# Altium PCB DriverV1.0.PcbDoc
Units mil, origin at the board's own origin, x right, y up, seen from the top; angles counter-clockwise.
Board outline 2047.24 x 1968.5 mil, 4 copper layers (Top, Gnd, Signal, Bottom), stack 58.4 mil thick; 73 components, 33 nets, 271 pads, 192 vias.
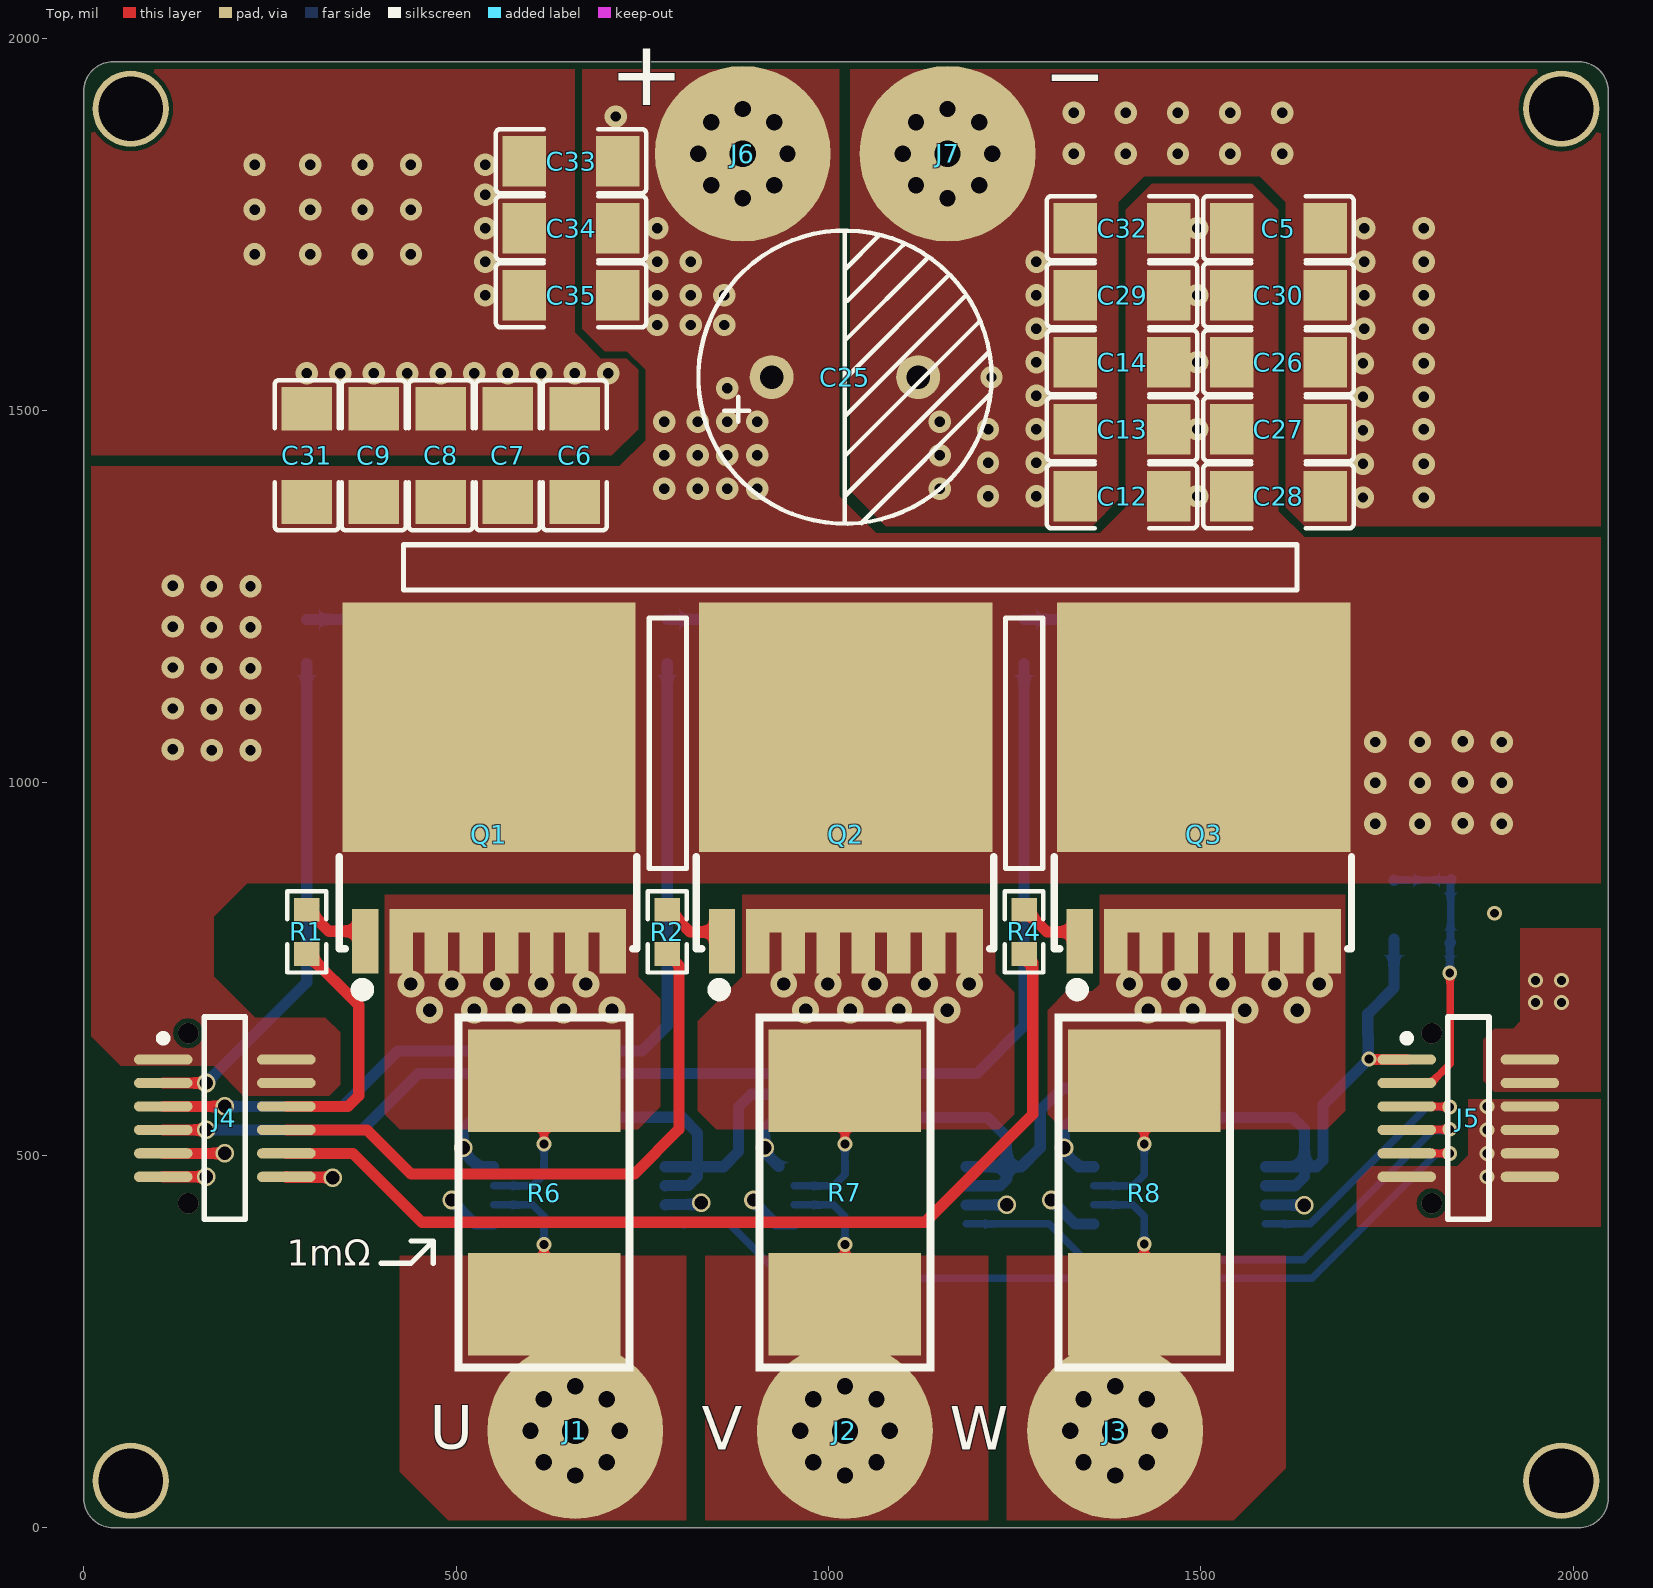
[diagram p0: Top view]
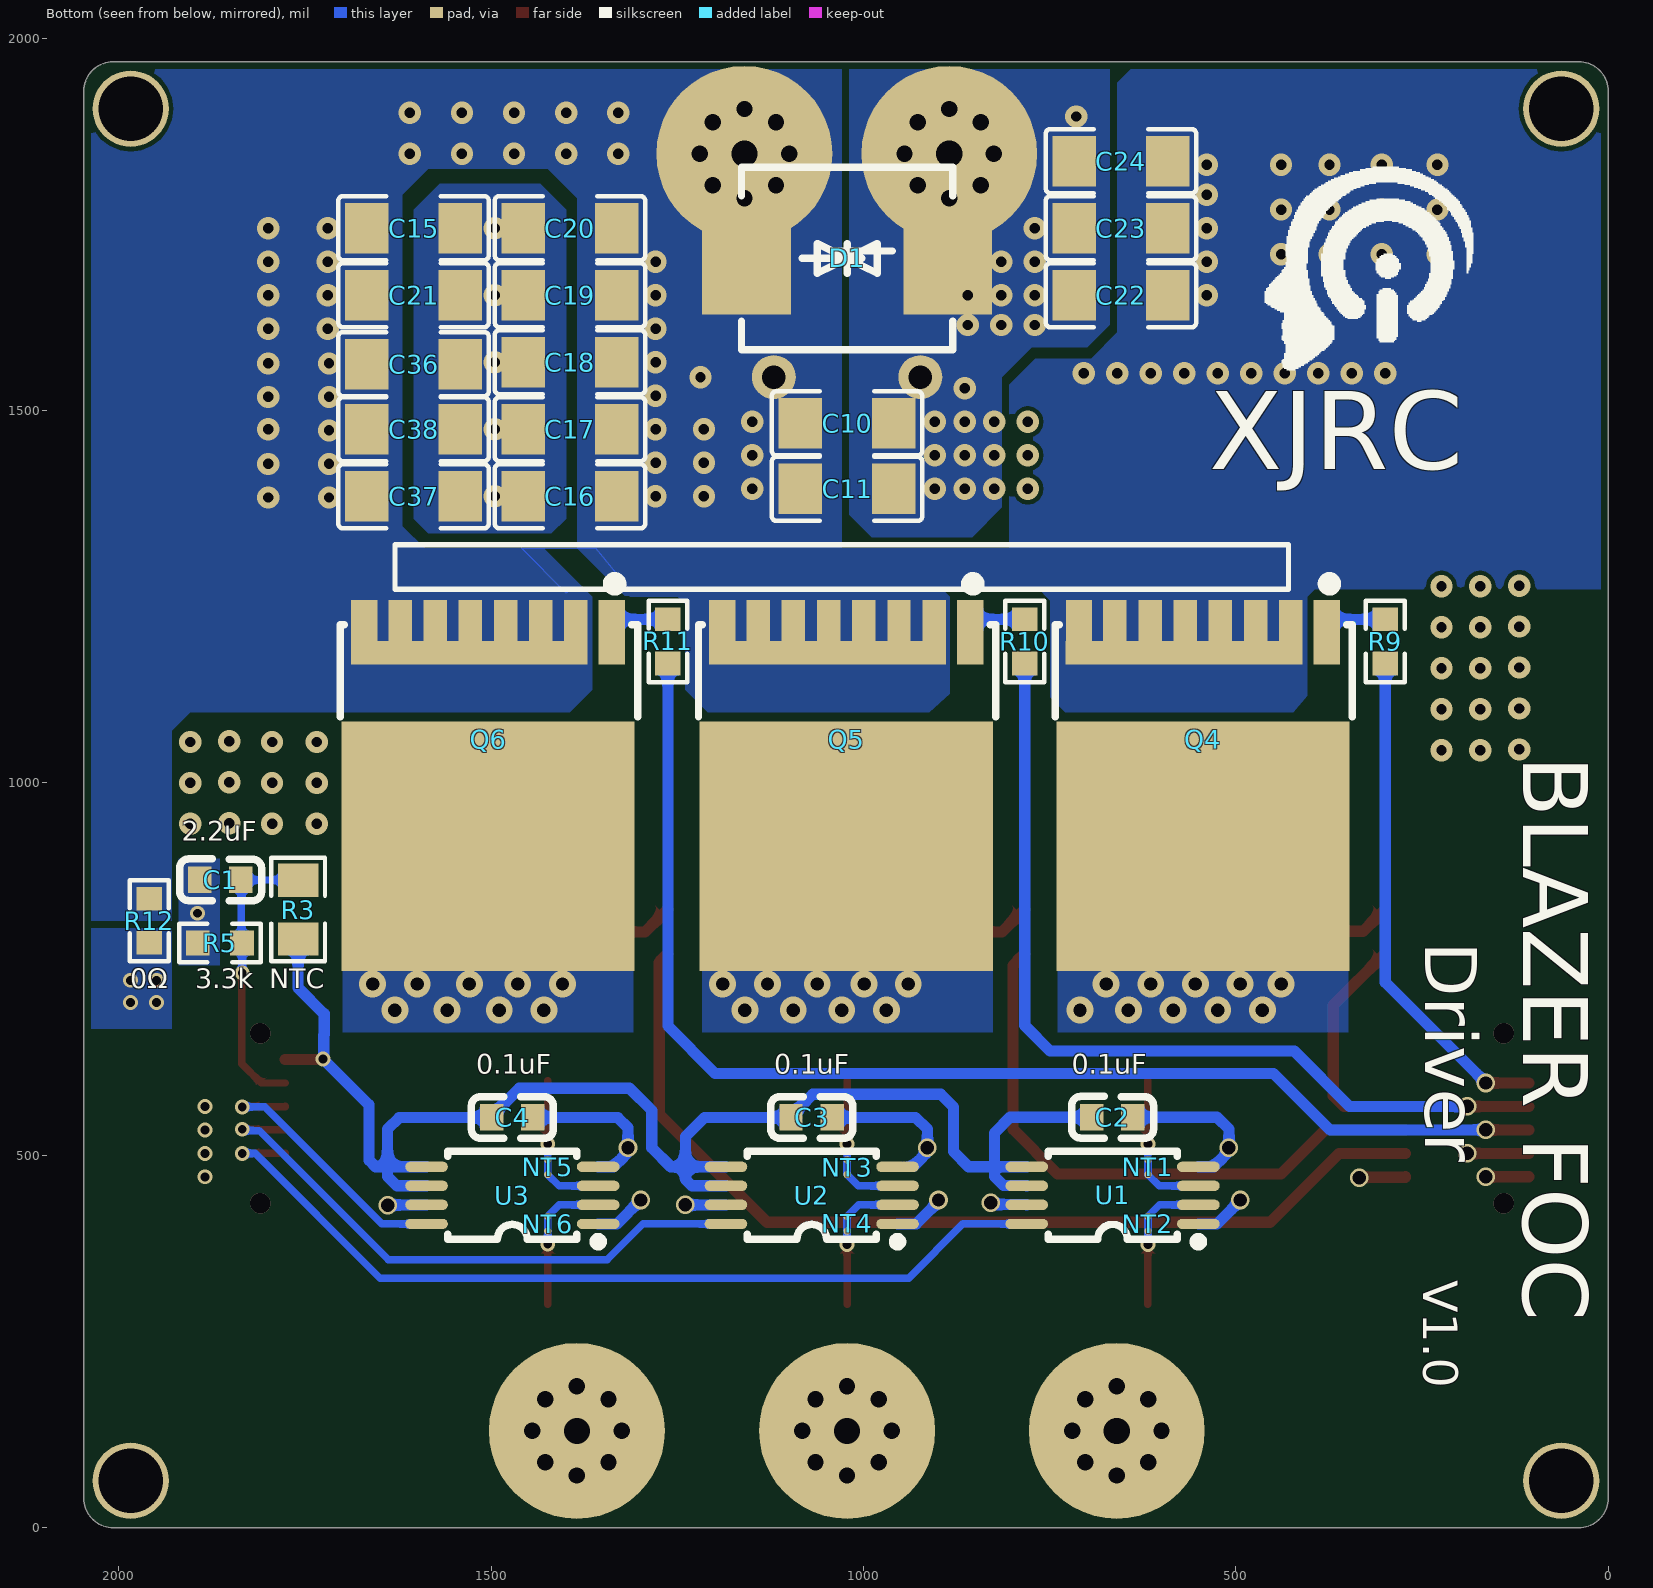
[diagram p1: Bottom view, seen from below]
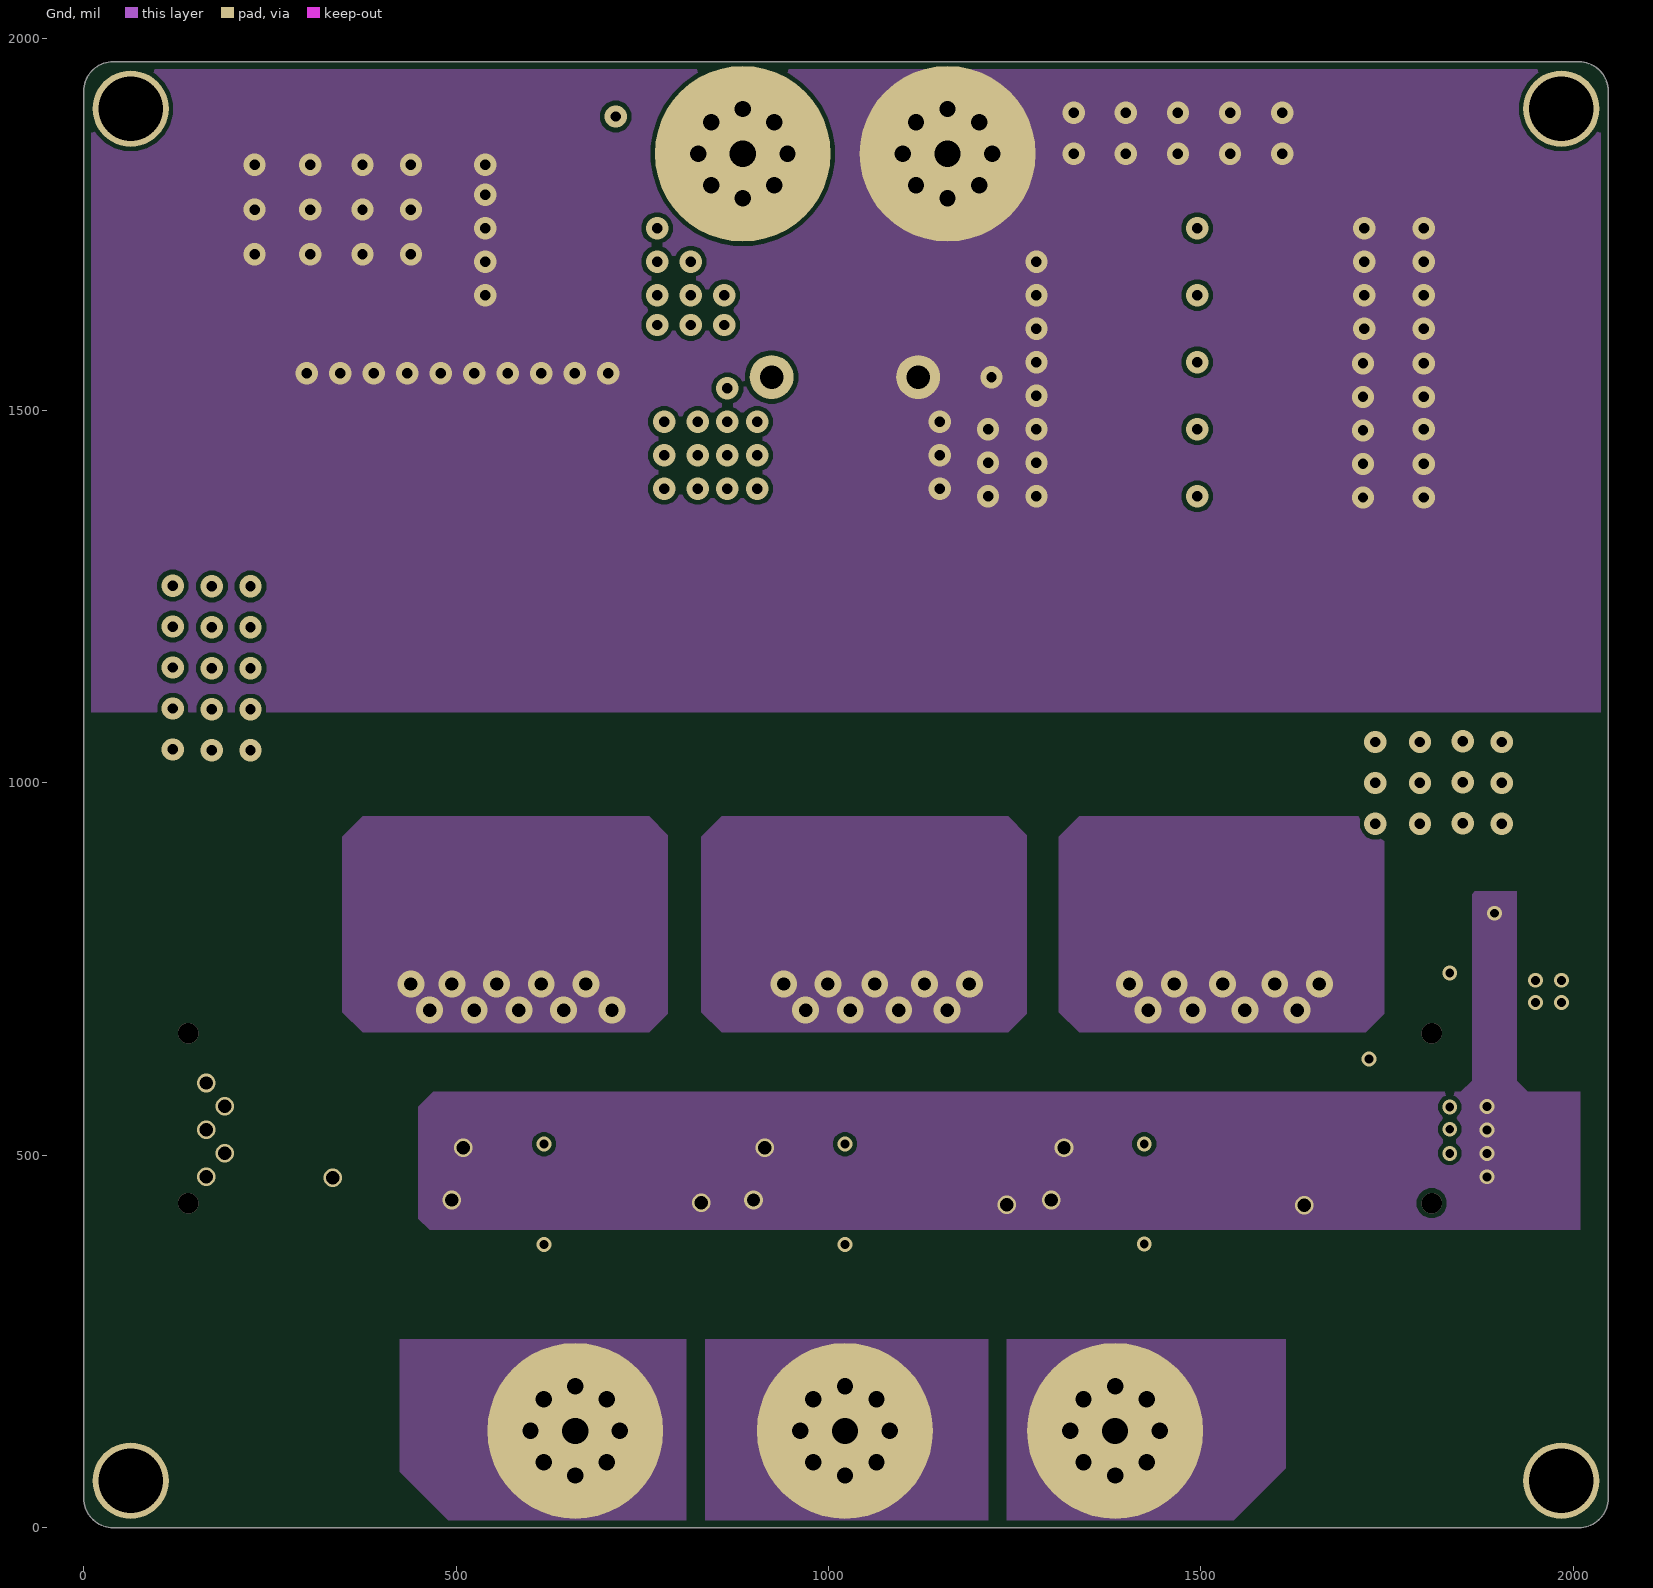
[diagram p2: Gnd]
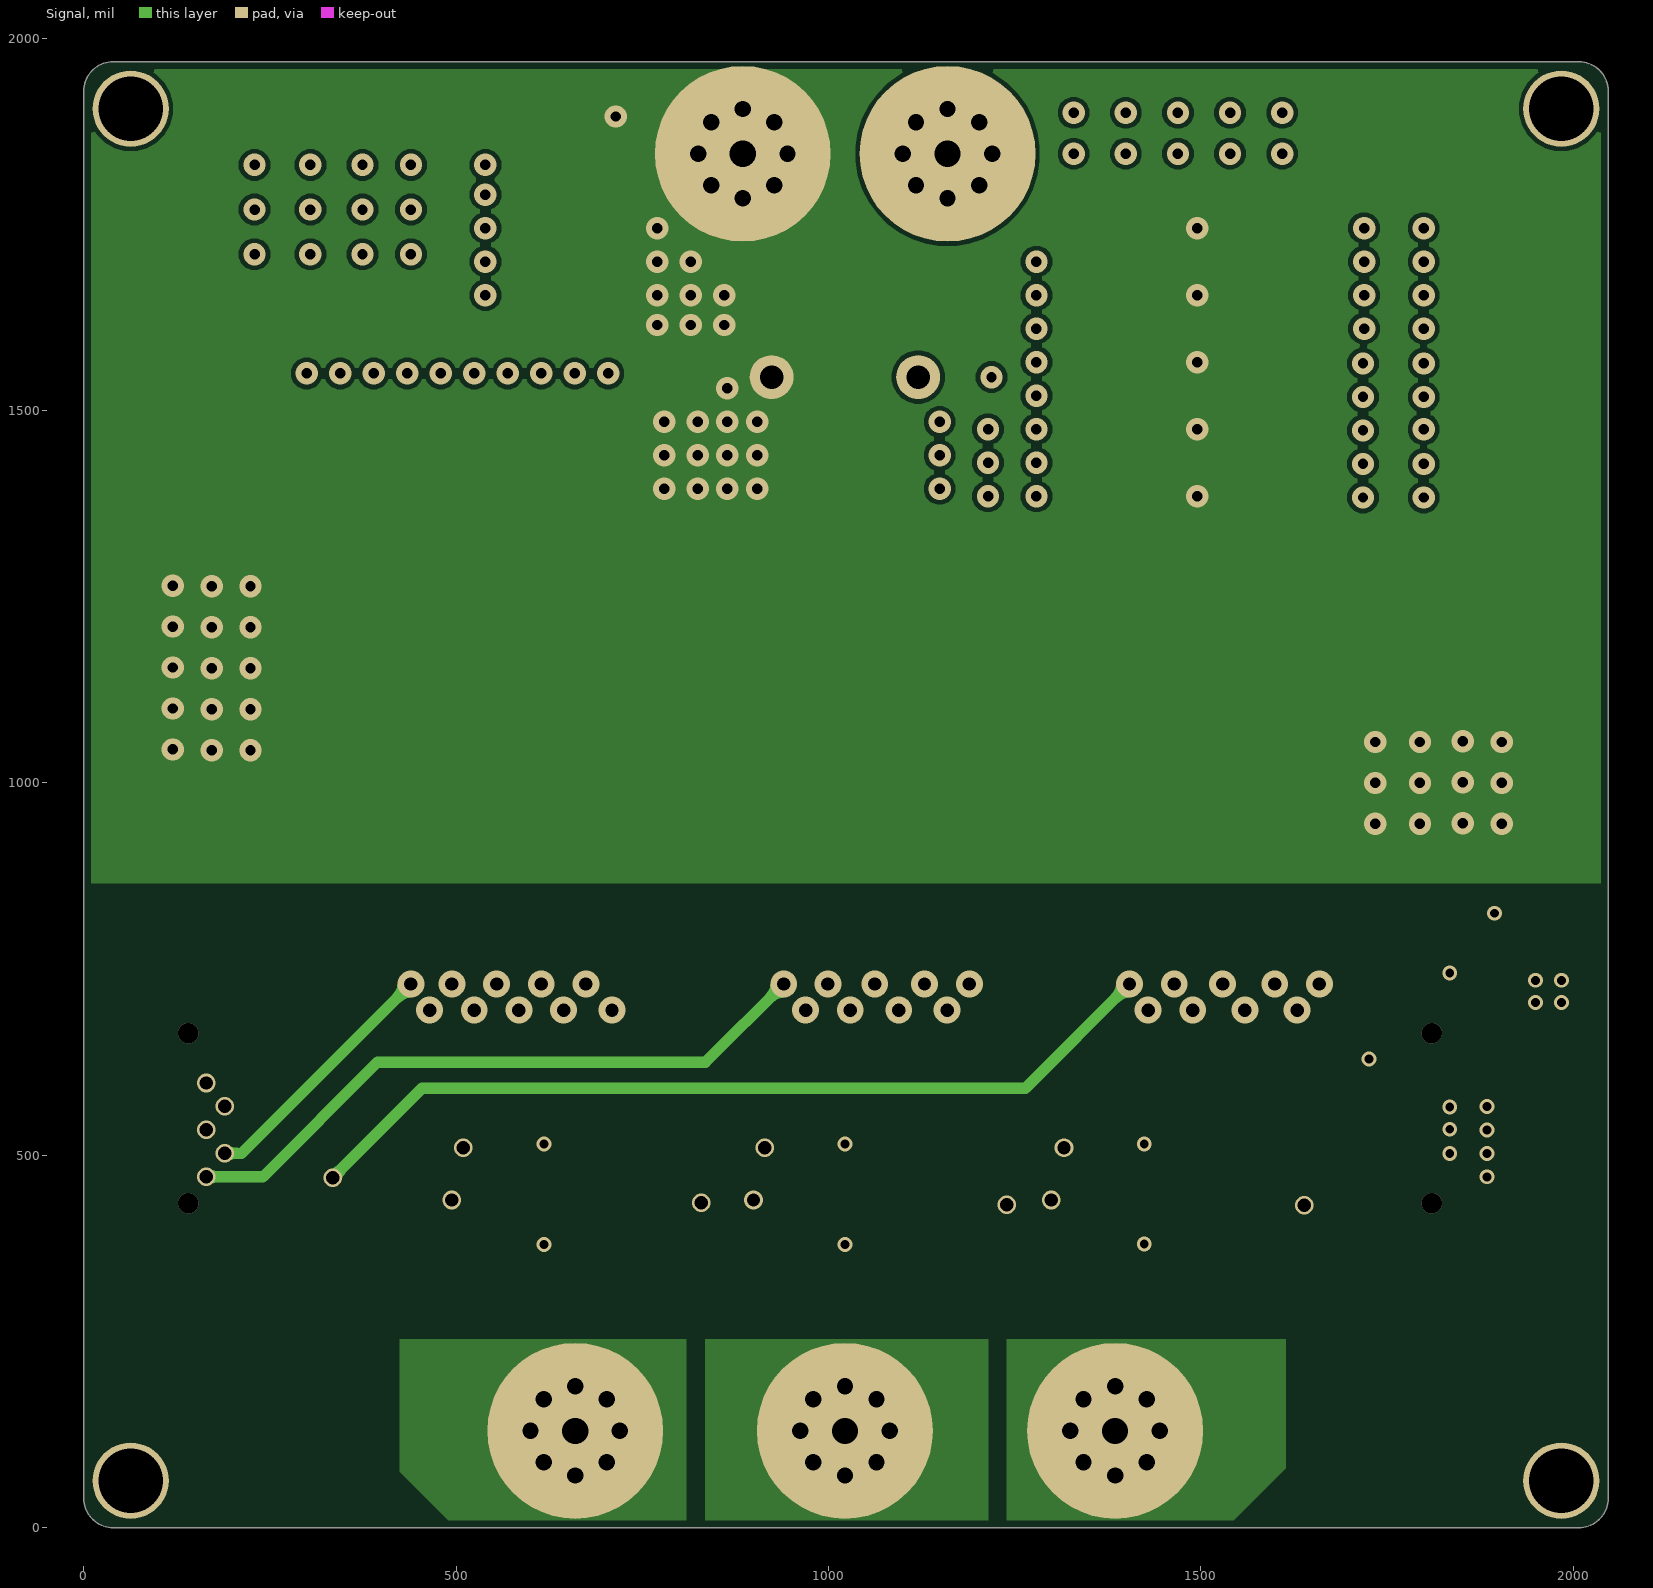
[diagram p3: Signal]
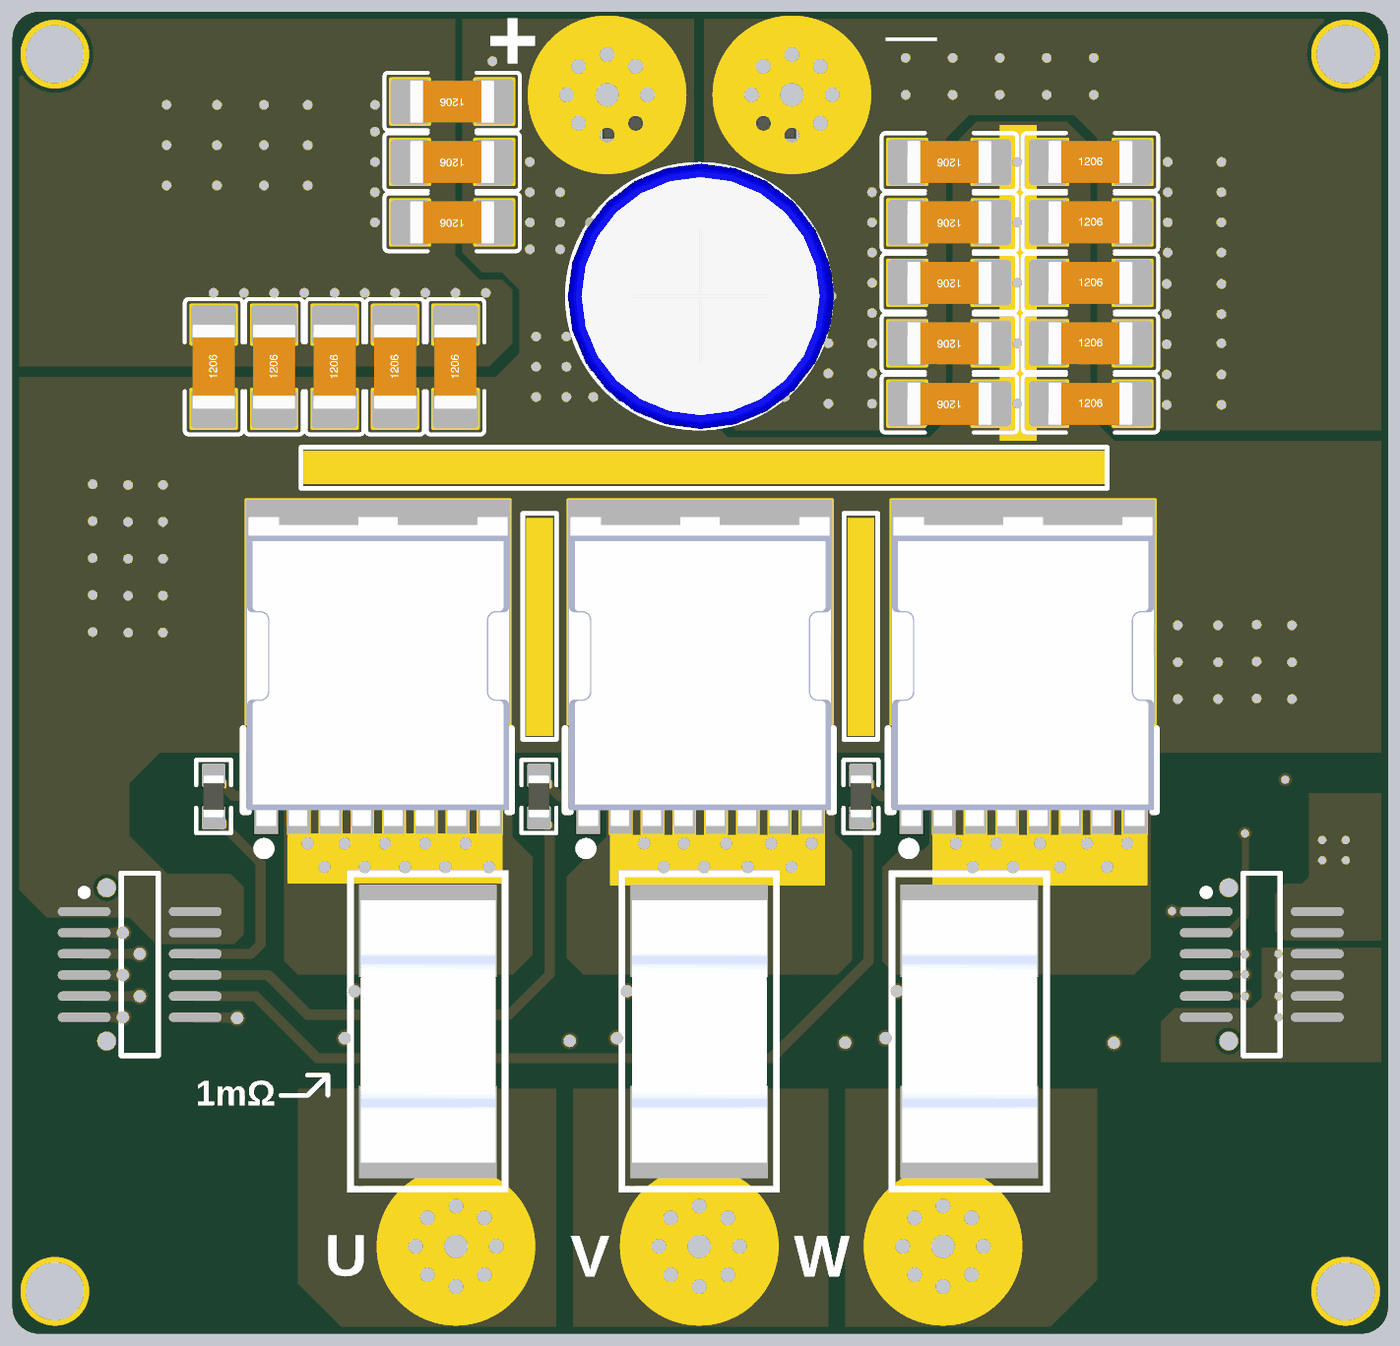
[diagram p4: 3D render of the assembled board from above, using the file's embedded part models]
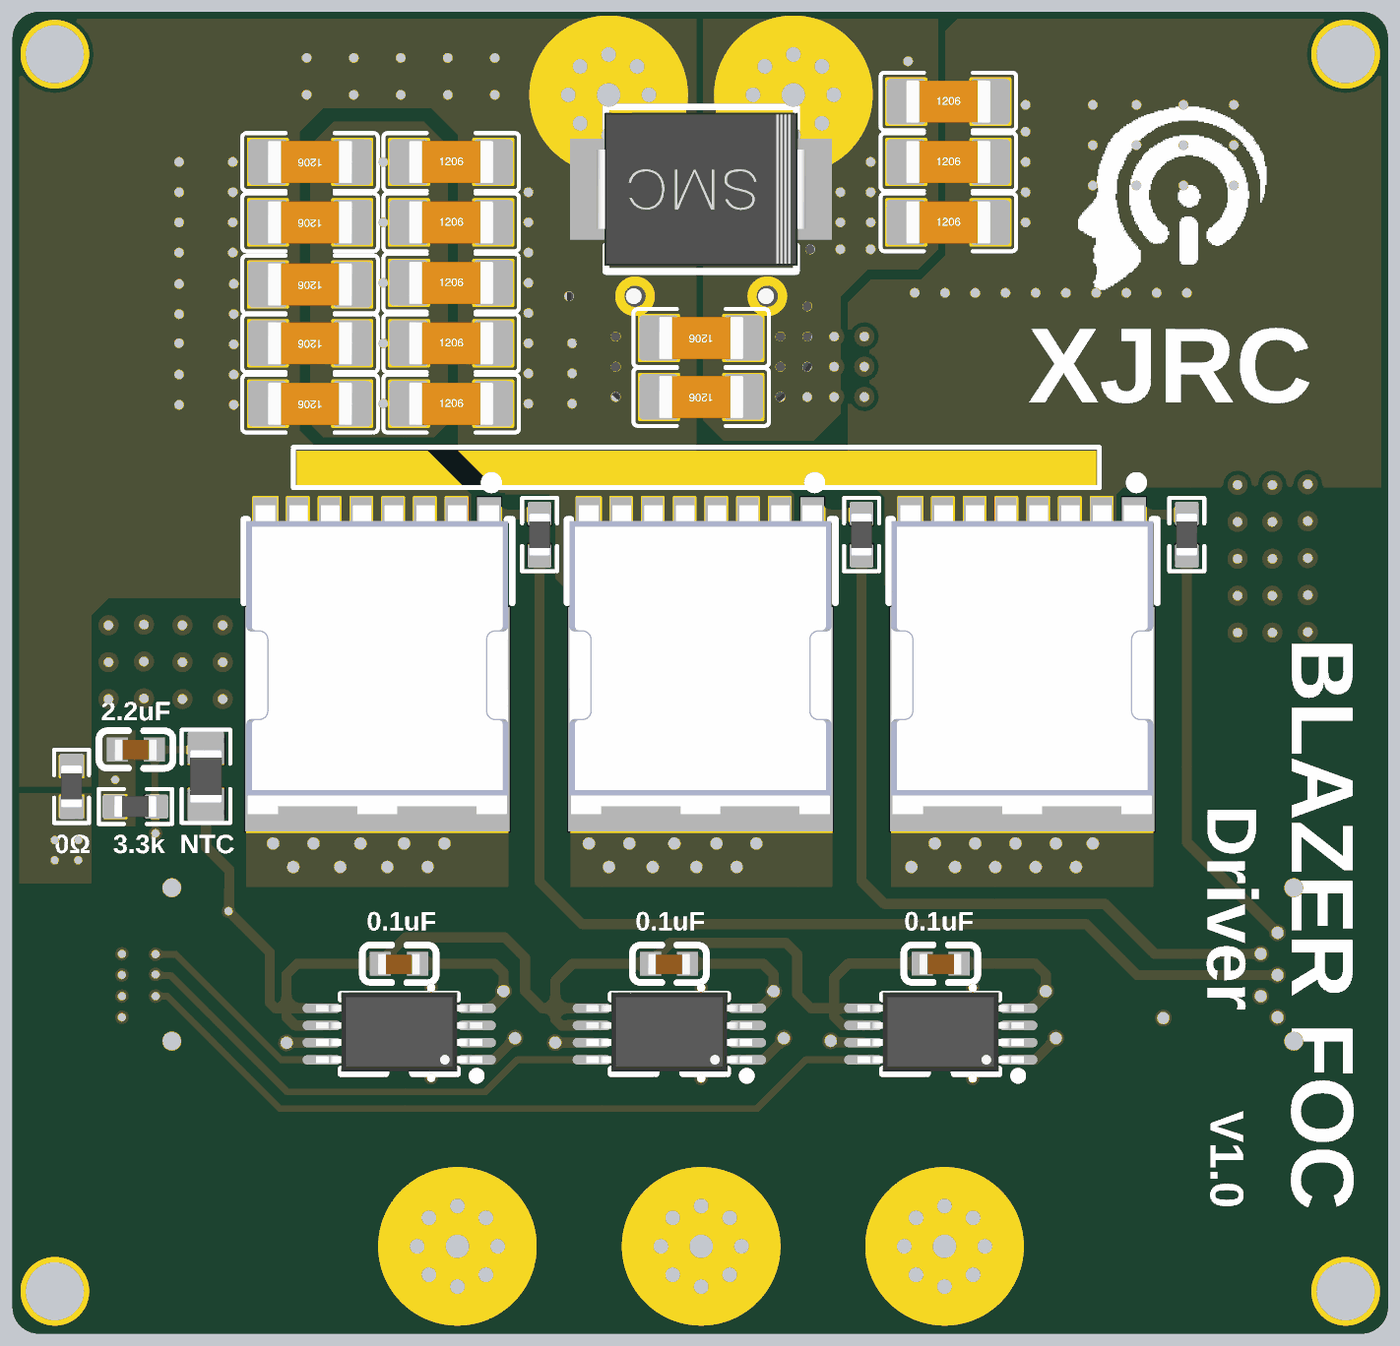
[diagram p5: 3D render of the assembled board from below, using the file's embedded part models]

## Layer stack, top to bottom
Top Solder: solder mask 0.4, Solder Resist, Dk 3.5
Top: signal copper 1.4
Dielectric 2: prepreg 2.8, PP-006, Dk 4.1
Gnd: signal copper 1.378
Dielectric 1: dielectric 47.2441, FR-4, Dk 4.8
Signal: signal copper 1.378
Dielectric 3: prepreg 2.8, PP-006, Dk 4.1
Bottom: signal copper 1.4
Bottom Solder: solder mask 0.4, Solder Resist, Dk 3.5

## Board outline
0,39.37 ccw(c39.37,39.37) 39.37,0 2007.87,0 ccw(c2007.87,39.37) 2047.24,39.37 2047.24,1929.13 ccw(c2007.87,1929.13) 2007.87,1968.5 39.37,1968.5 ccw(c39.37,1929.13) 0,1929.13

## Design rules (kind name [scope] priority, off if disabled: settings)
BoardOutlineClearance [All] p1: gap=0 ignorepadtopadclearanceinfootprint=FALSE except(10: Poly-OutlineEdge)
Clearance [All] p1: gap=6 ignorepadtopadclearanceinfootprint=FALSE except(4: Arc-Arc Arc-Track Track-Track)
ComponentClearance [All] p1: gap=0 collisioncheckmode=3 verticalgap=0 showdistances=FALSE
Height [All] p1: minheight=0 maxheight=2000 prefheight=500
HoleSize [All] p1: absolutevalues=TRUE maxlimit=500 minlimit=1 maxpercent=80.000 minpercent=20.000
HoleToHoleClearance [All] p1: gap=0 allowstackedmicrovias=TRUE
MinimumSolderMaskSliver [All] p1: minsoldermaskwidth=0
PolygonConnect PolygonConnect_PGND [InNet('PGND')] p1: connectstyle=Direct reliefconductorwidth=10 reliefentries=4 polygonreliefangle="90 Angle" airgapwidth=10
PolygonConnect [All] p2: connectstyle=Direct reliefconductorwidth=10 reliefentries=4 polygonreliefangle="90 Angle" airgapwidth=10
RoutingVias [All] p1: holewidth=12 width=24 viastyle="Through Hole" minholewidth=10 minwidth=10 maxholewidth=30 maxwidth=50
SilkToSilkClearance [All] p1: silktosilkclearance=0
SilkToSolderMaskClearance [IsPad] p1: minsilkscreentomaskgap=0 clearancetoexposedcopper=TRUE
SolderMaskExpansion [IsVia] p1: expansion=4 istentingtop=TRUE
Width [All] p1: maxlimit=100 minlimit=6 preferedwidth=10
23 further rules are at their usual default settings.

## Components (designator, comment, footprint, x,y, rotation, side; value= is the part's Value field where it differs from the comment)
C1 "2.2uf" 0603C 1863.76,870 r0 bottom
C2 "0.1uf" 0603C 665.93,551.06 r0 bottom
C3 "0.1uf" 0603C 1069.92,550.85 r0 bottom
C4 "0.1uf" 0603C 1471.96,550.85 r0 bottom
C5 "10uf" 1206C 1604.37,1745 r0 top
C6 "10uf" 1206C 659.37,1440 r90 top
C7 "10uf" 1206C 569.37,1440 r90 top
C8 "10uf" 1206C 479.37,1440 r90 top
C9 "10uf" 1206C 389.37,1440 r90 top
C10 "10uf" 1206C 1022.21,1482.87 r0 bottom
C11 "10uf" 1206C 1022.21,1395 r0 bottom
C12 "10uf" 1206C 1394.37,1385 r180 top
C13 "10uf" 1206C 1394.37,1475 r180 top
C14 "10uf" 1206C 1394.37,1565 r180 top
C15 "10uf" 1206C 1604.37,1745 r0 bottom
C16 "10uf" 1206C 1394.37,1385 r180 bottom
C17 "10uf" 1206C 1394.37,1475 r180 bottom
C18 "10uf" 1206C 1394.37,1565 r180 bottom
C19 "10uf" 1206C 1394.37,1655 r180 bottom
C20 "10uf" 1206C 1394.37,1745 r180 bottom
C21 "10uf" 1206C 1604.37,1655 r0 bottom
C22 "10uf" 1206C 654.37,1655 r180 bottom
C23 "10uf" 1206C 654.37,1745 r180 bottom
C24 "10uf" 1206C 654.37,1835 r180 bottom
C25 "220uf" ELECTRO10-5-N 923.78,1545 r0 top
C26 "10uf" 1206C 1604.37,1565 r0 top
C27 "10uf" 1206C 1604.37,1475 r0 top
C28 "10uf" 1206C 1604.37,1385 r0 top
C29 "10uf" 1206C 1394.37,1655 r180 top
C30 "10uf" 1206C 1604.37,1655 r0 top
C31 "10uf" 1206C 299.37,1440 r90 top
C32 "10uf" 1206C 1394.37,1745 r180 top
C33 "10uf" 1206C 654.37,1835 r180 top
C34 "10uf" 1206C 654.37,1745 r180 top
C35 "10uf" 1206C 654.37,1655 r180 top
C36 "10uf" 1206C 1604.37,1562.5 r0 bottom
C37 "10uf" 1206C 1604.37,1385 r0 bottom
C38 "10uf" 1206C 1604.37,1475 r0 bottom
D1 "SMCJ36CA" SMC 1022.21,1704.37 r180 bottom
J1 "Pad" PAD 660,130 r0 top
J2 "Pad" PAD 1022.21,130 r0 top
J3 "Pad" PAD 1385,130 r0 top
J4 "BTB-2X6-M" BTB-M-0.8mm-2x6P 189.37,549.84 r0 top
J5 "BTB-2X6-M" BTB-M-0.8mm-2x6P 1859.37,549.84 r0 top
J6 "Pad" PAD 885,1845 r0 top
J7 "Pad" PAD 1160,1845 r0 top
NT1 "0.25mm" NetTie_0.25mm 618.11,493.78 r270 bottom net-tie
NT2 "0.25mm" NetTie_0.25mm 618.11,398.19 r90 bottom net-tie
NT3 "0.25mm" NetTie_0.25mm 1022.21,493.78 r270 bottom net-tie
NT4 "0.25mm" NetTie_0.25mm 1022.21,398.19 r90 bottom net-tie
NT5 "0.25mm" NetTie_0.25mm 1424.13,493.78 r270 bottom net-tie
NT6 "0.25mm" NetTie_0.25mm 1424.13,398.19 r90 bottom net-tie
Q1 "HYG006N04LS1TA" TOLL 544.18,931.14 r0 top
Q2 "HYG006N04LS1TA" TOLL 1023.39,931.14 r0 top
Q3 "HYG006N04LS1TA" TOLL 1504.06,931.14 r0 top
Q4 "HYG006N04LS1TA" TOLL 544.37,1058.7 r0 bottom
Q5 "HYG006N04LS1TA" TOLL 1023.31,1058.7 r0 bottom
Q6 "HYG006N04LS1TA" TOLL 1504.37,1058.7 r0 bottom
R1 "2.2R" 0603R 299.37,800 r90 top
R2 "2.2R" 0603R 783.58,800 r90 top
R3 "NTC 10k" 0805R 1759.37,830 r270 bottom
R4 "2.2R" 0603R 1262.8,800 r90 top
R5 "3.3k" 0603R 1864.37,785 r180 bottom
R6 "HoLRS3920-3W-1mR-1%" 3920R 618.11,450 r90 top value=0.001R
R7 "HoLRS3920-3W-1mR-1%" 3920R 1022.21,450 r90 top value=0.001R
R8 "HoLRS3920-3W-1mR-1%" 3920R 1424.13,450 r90 top value=0.001R
R9 "2.2R" 0603R 299.37,1190 r90 bottom
R10 "2.2R" 0603R 783.58,1190 r90 bottom
R11 "2.2R" 0603R 1262.8,1190 r90 bottom
R12 "0R" 0603R 1959.37,815 r270 bottom
U1 "INA240A1PWR" TSSOP-8 665.63,446.18 r90 bottom
U2 "INA240A1PWR" TSSOP-8 1069.61,446.18 r90 bottom
U3 "INA240A1PWR" TSSOP-8 1471.66,446.18 r90 bottom

## Footprints (in the part's own frame and the unit in brackets; to place one, negate y for a bottom-side part, rotate by r counter-clockwise, add the part's x,y. Pads: shape width x height; smd on the part's side, far side on the other; paste and mask are expansions set on the pad)
0603C [mm]
  rect 0.8x0.9 smd: 1(-0.7,0) 2(0.7,0)
  silkscreen extent -1.41,-0.71 1.39,0.72, body extent -0.8,-0.38 0.8,0.42, height 0.6
0603R [mil]
  rect 31.75x34.02 smd paste-3937.01 mask+2: 1(-29.66,0) 2(29.66,0)
  silkscreen extent -55,-26 55,26, body extent -31,-16 31,16, height 15
0805R [mm]
  rect 1.133x1.377 smd paste-100 mask+0.051: 1(-1,0) 2(1,0)
  silkscreen extent -1.76,-0.92 1.76,0.92, body extent -1,-0.6 1,0.6, height 0.5
1206C [mm]
  rect 1.485x1.728 smd paste-100 mask+0.051: 1(-1.593,0) 2(1.593,0)
  silkscreen extent -2.56,-1.09 2.56,1.09, body extent -1.6,-0.81 1.6,0.81, height 1.21
3920R [mm]
  rect 3.5x5.2 smd: 1(-3.81,0) 2(3.81,0)
  silkscreen extent -6.1,-3.05 6.1,3.05, body extent -4.96,-2.56 4.96,2.54, height 0.93
BTB-M-0.8mm-2x6P [mm] "0.8间距2x6P公座，SMD"
  oval 2x0.35 smd: 1(-2.1,2) 2(-2.1,1.2) 3(-2.1,0.4) 4(-2.1,-0.4) 5(-2.1,-1.2) 6(-2.1,-2) 7(2.1,-2) 8(2.1,-1.2) 9(2.1,-0.4) 10(2.1,0.4) 11(2.1,1.2) 12(2.1,2)
  silkscreen extent -2.22,-3.45 0.7,3.45, body extent -1.1,-3.45 1.1,3.45, height 2
ELECTRO10-5-N [mm]
  round 1.5 hole 0.8: 1(0,0) 2(5,0)
  silkscreen extent -2.5,-5 7.5,5, body extent -2.48,-5.03 7.58,5.03, height 12.78
NetTie_0.25mm [mm] "Net tie, 0.25mm"
  round 0.25 smd paste-2: 1(0,0) 2(0.5,0)
  Top region: 0,0.125 0.5,0.125 0.5,-0.125 0,-0.125
PAD [mil] "Connector; Header; 3x2 Position"
  round 22 hole 22: 1(-60,0) 1(-42.43,-42.43) 1(-42.43,42.43) 1(0,-60) 1(0,60) 1(42.43,-42.43) 1(42.43,42.43) 1(60,0)
  round 236.22 hole 35: 1(0,0)
SMC [mm]
  rect 3.03x3.82 smd: 1(-3.435,0) 2(3.435,0)
  silkscreen extent -3.6,-3.11 3.6,3.11, body extent -3.95,-2.9 3.95,2.9, height 2.45
TOLL [mm]
  rect 0.9x2.2 smd paste-100 mask+0.05: 1(-4.225,-3.65) 8(4.225,-3.65)
  rect 0.8x2.2 smd paste-100 mask+0.05: 2(-3,-3.65) 3(-1.8,-3.65) 4(-0.6,-3.65) 5(0.6,-3.65) 6(1.8,-3.65) 7(3,-3.65)
  rect 8.08x0.8 smd paste-100 mask+0.05: 8(0.64,-2.95)
  rect 10x8.5 smd paste-100 mask+0.05: 9(0,3.65)
  silkscreen extent -5.1,-5.5 5.04,-0.76, body extent -4.95,-4.44 4.95,7.24, height 2.32
TSSOP-8 [mil]
  oval 13.9x57.24 smd: 1(-38.39,-115.24) 2(-12.79,-115.24) 3(12.8,-115.24) 4(38.39,-115.24) 5(38.39,115.24) 6(12.8,115.24) 7(-12.79,115.24) 8(-38.39,115.24)
  silkscreen extent -68,-121 59,87, body extent -56,-124 62,124, height 43

## Part data
C1 C2 C3 C4 C5 C6 C7 C8 C9 C10 C11 C12 C13 C14 C15 C16 C17 C18 C19 C20 C21 C22 C23 C24 C26 C27 C28 C29 C30 C31 C32 C33 C34 C35 C36 C37 C38: library part CAP, "贴片电容"
C25: library part CAP+, "极性电容"
D1: "极性:双向;", JLCPCB Part Class=扩展库, LCSC Part Name=双向, Manufacturer=TWGMC(台湾迪嘉), Manufacturer Part=SMBJ28CA, Add into BOM=yes, Convert to PCB=yes, Datasheet=https://atta.szlcsc.com/upload/public/pdf/source/20200901/C726811_07201DC3516E92FF13903A0BAE18F725.pdf, Device=SMBJ28CA_C726872, Polarity=双向, Supplier=LCSC, Supplier Footprint=SMB, Supplier Part=C726872, Symbol=SMBJ28CA_C726872
J1 J2 J3 J6 J7: "焊盘"
J4 J5: "0.8间距2x6P公座"
NT1 NT2 NT3 NT4 NT5 NT6: library part NetTie_0.25mm
Q1 Q2 Q3 Q4 Q5 Q6: "N沟道增强型MOS 40V-600A", Continuous Drain Current (Id)=600A, Drain Source On Resistance (RDS(on)@Vgs,Id)=0.45mΩ@10V,80A, Drain Source Voltage (Vdss)=40V, Gate Threshold Voltage (Vgs(th)@Id)=1.8V@250uA, Input Capacitance (Ciss@Vds)=15.4nF@25V, JLCPCB Part Class=扩展库, LCSC Part Name="N沟道 40V 600A", Manufacturer=HUAYI(华羿微), Operating Temperature=-55℃~+175℃@(Tj), Power Dissipation (Pd)=428W, Reverse Transfer Capacitance (Crss@Vds)=115pF@25V, Add into BOM=yes, Convert to PCB=yes, Datasheet=https://atta.szlcsc.com/upload/public/pdf/source/20220321/91BDC8248F772C15069ACBA52C025F8E.pdf, Device=HYG006N04LS1TA, Manufacturer Part=HYG006N04LS1TA, Supplier=LCSC, Supplier Footprint=TOLL, Supplier Part=C2982928, Symbol=HYG006N04LS1TA, Total Gate Charge (Qg@Vgs)=230nC@10V, Type=N沟道
R1 R2 R4 R5 R9 R10 R11 R12: library part RES, "贴片电阻"
R3: library part RT, "热敏电阻"
R6 R7 R8: library part HoLRS3920, "采样电阻", JLCPCB Part Class=扩展库, LCSC Part Name="1mΩ ±1% 8W", Manufacturer=RESI(开步睿思）, Manufacturer Part=SEWF3920F1L00P9, Power(Watts)=8W, Temperature Coefficient=±25ppm/℃, Tolerance=±1%, Add into BOM=yes, Convert to PCB=yes, Datasheet=https://atta.szlcsc.com/upload/public/pdf/source/20231123/B35E1474215435358D1EA89A1F2CD565.pdf, Device=SEWF3920F1L00P9, Mounting Sytle=贴片, Supplier=LCSC, Supplier Footprint=3920, Supplier Part=C5224161, Symbol=SEWF3920F1L00P9, Type=采样电阻
U1 U2 U3: JLCPCB Part Class=扩展库, Manufacturer=TI(德州仪器), Operating Temperature=-40℃~+125℃, Supply Current=1.8mA, Add into BOM=yes, Convert to PCB=yes, Datasheet=https://www.ti.com/cn/lit/gpn/ina240, Device=INA240A1PWR, LCSC Part Name=INA240A1PWR, Manufacturer Part=INA240A1PWR, Name=INA240A1PWR, Number of Channels=1, Supplier=LCSC, Supplier Footprint=TSSOP-8, Supplier Part=C93965, Symbol=INA240A1PWR

## Free pads (board coordinates)
  round 102.36 hole 86.61: 8(62.99,62.99) 8(62.99,1905.51) 8(1984.25,62.99) 8(1984.25,1905.51)

## Via types
v1: diameter 30, hole 14, Top to Bottom, tented both sides, 125 vias
v2: diameter 36, hole 18, Top to Bottom, tented both sides, 28 vias
v3: diameter 20, hole 12, Top to Bottom, tented both sides, 20 vias
v4: diameter 25, hole 18, Top to Bottom, tented both sides, 15 vias
v5: diameter 27.56, hole 27.56, Top to Bottom, tented both sides, 4 vias

## Nets (pads, with @x,y where several pads share a name; then routed paths per layer and width w, separated by ;. In a path a pad name is that pad's centre, name@x,y a point inside that pad or via, vN(x,y) a via of type N, cw(c..) or ccw(c..) an arc to the next point about the centre after c; other vN are vias at no path point)
A_N: NT1.2 U1.3 | length 74
  Bottom w10: U1.3 603,458.98 NT1.2
A_P: NT2.2 U1.2 | length 74.1
  Bottom w10: U1.2 602.59,433.39 NT2.2
AGND: C1.2 C2.1 C3.1 C4.1 J5.6 J5.7 J5.8 J5.9 J5.10 R5.1 U1.1 U1.4 U1.7 U2.1 U2.4 U2.7 U3.1 U3.4 U3.7 | length 989
  Bottom w15: v4(494.37,440) 494.37,438.82 525.4,407.79 U1.1 ; U1.4 529.82,484.57 511.28,503.11 511.28,508.09 v4(509.37,510) 509.37,535 525.43,551.06 C2.1 ; U1.7 781.42,433.94 824.61,433.94 826.66,436 v4(829.37,436) ; v4(899.37,440) 899.37,437.8 929.38,407.79 U2.1 ; U2.4@933.25,485.12 916.28,502.09 916.28,508.09 v4(914.37,510) 914.37,535 930.22,550.85 C3.1 ; U2.7 v4(1239.37,433.39) ; v4(1299.37,440) 1299.37,439.85 1331.43,407.79 U3.1 ; U3.4 1335.85,484.57 1318.25,502.17 1318.25,508.09 v4(1316.34,510) 1316.34,536.97 1330.22,550.85 C4.1 ; U3.7 1587.04,433.25 1639.1,433.25 v4(1639.24,433.11)
  other v3: 1884.37,471.1 1884.37,502.6 1884.37,534.09 1884.37,565.59 1894.37,825
AVCC: C2.2 C3.2 C4.2 J5.1 R3.2 U1.5 U1.6 U2.5 U2.6 U3.5 U3.6 | length 2102.1
  Top w15: v3@1726.42,628.58 J5.1
  Bottom w15: C2.2 803.31,551.06 824.37,530 824.37,489.04 819.91,484.57 ; U1.6 781.42,459.53 812.08,459.53 824.28,471.73 824.28,480.19 819.91,484.57 ; U1.5 819.91,484.57 ; U2.5 1239.37,484.57 ; 1220.58,459.53 1185.4,459.53 U2.6 1230.58,458.98 1239.37,467.77 1239.37,484.57 ; U3.6 1626.8,458.98 1639.37,471.55 1639.37,484.57 ; U3.5 1639.37,484.57 ; R3.2 1759.37,725 1724.37,690 1724.37,661.98 1724.85,661.5 1724.85,630.15 v3(1725.81,629.19) 1664.37,567.76 1664.37,493.36 1655.58,484.57 1639.37,484.57 ; 819.91,484.57 858.94,484.57 879.37,505 879.37,565 896.44,582.07 1068.23,582.07 1097.48,552.82 C3.2 1213.52,550.85 1239.37,525 1239.37,484.57 ; 1239.37,484.57 1258.94,484.57 1284.37,510 1284.37,560 1314.37,590 1462.34,590 1499.52,552.82 C4.2 1623.52,550.85 1639.37,535 1639.37,484.57
B_N: NT3.2 U2.3 | length 74.1
  Bottom w10: U2.3 1007.1,458.98 NT3.2
B_P: NT4.2 U2.2 | length 74.3
  Bottom w10: U2.2 1006.69,433.39 NT4.2
C_N: NT5.2 U3.3 | length 74
  Bottom w10: U3.3 1409.02,458.98 NT5.2
C_P: NT6.2 U3.2 | length 74.1
  Bottom w10: U3.2 1408.62,433.39 NT6.2
DCBUS: C5.1 C6.1 C7.1 C8.1 C9.1 C10.1 C11.1 C12.1 C13.1 C14.1 C15.1 C16.1 C17.1 C18.1 C19.1 C20.1 C21.1 C22.1 C23.1 C24.1 C25.1 C26.1 C27.1 C28.1 C29.1 C30.1 C31.1 C32.1 C33.1 C34.1 C35.1 C36.1 C37.1 C38.1 D1.2 J4.1 J4.11 J4.12 J6.1 Q1.9 Q2.9 Q3.9
  other v1: 1734.37,945 1794.37,945 1904.37,945 1851.64,945.99 1734.37,1000 1794.37,1000 1904.37,1000 1851.64,1000.99 172.1,1044.01 223.87,1044.01 119.37,1045 1734.37,1055 1794.37,1055 1904.37,1055 1851.64,1055.99 172.1,1099.01 223.87,1099.01 119.37,1100 172.1,1154.01 223.87,1154.01 119.37,1155 172.1,1209.01 223.87,1209.01 119.37,1210 172.1,1264.01 223.87,1264.01 119.37,1265 1495.3,1385 779.37,1395 824.37,1395 864.37,1395 904.37,1395 779.37,1440 824.37,1440 864.37,1440 904.37,1440 1495.3,1475 779.37,1485 824.37,1485 864.37,1485 904.37,1485 864.37,1530 1495.3,1565 770,1615 815,1615 860,1615 770,1655 815,1655 860,1655 1495.3,1655 770,1700 815,1700 770,1745 1495.3,1745 714.37,1895
GH_A: J4.10 R1.1 | length 323.3
  Top w15: J4.10 354.96,565.59 369.37,580 369.37,701.47 300.5,770.34 R1.1
GH_B: J4.9 R2.1 | length 819.2
  Top w15: J4.9 380.28,534.09 439.37,475 739.37,475 799.37,535 799.37,754.55 793.09,760.83 793.09,761.96 784.72,770.34 R2.1
GH_C: J4.8 R4.1 | length 1321.5
  Top w15: J4.8 361.77,502.6 454.37,410 1129.37,410 1274.37,555 1274.37,758.77 1272.3,760.83 1272.3,761.96 1263.93,770.34 R4.1
GL_A: J4.2 R9.1 | length 676.8
  Top w15: J4.2 v4(164.37,597.09)
  Bottom w15: v4(164.37,597.09) 299.37,732.09 R9.1
GL_B: J4.3 R10.1 | length 1208
  Top w15: J4.3 v4(189.37,565.59)
  Bottom w15: v4(189.37,565.59) 347.24,565.59 421.65,640 749.37,640 783.58,674.21 R10.1
GL_C: J4.4 R11.1 | length 1700.7
  Top w15: J4.4 v4(164.37,534.09)
  Bottom w15: v4(164.37,534.09) 373.46,534.09 449.37,610 1199.37,610 1262.8,673.43 R11.1
GND: J5.11 J5.12 R12.2
  other v3: 1949.37,705 1984.37,705 1949.37,735 1984.37,735
NetQ1_1: Q1.1 R1.2 | length 119.1
  Top w15: R1.2 300.5,829.66 329.37,800.79 367.62,800.79 377.84,790.58 Q1.1 377.84,780.56 Q1.1@367.62,770.34
NetQ2_1: Q2.1 R2.2 | length 113.7
  Top w15: R2.2 784.72,829.66 814.37,800.01 846.84,800.01 857.06,789.79 Q2.1 857.06,780.56 Q2.1@846.84,770.34
NetQ3_1: Q3.1 R4.2 | length 93.8
  Top w15: R4.2 1263.93,829.66 1293.59,800 1327.5,800 1337.72,789.78 Q3.1
NetQ4_1: Q4.1 R9.2 | length 89.9
  Bottom w15: R9.2 367.81,1219.66 378.03,1209.44 Q4.1
NetQ5_1: Q5.1 R10.2 | length 84.7
  Bottom w15: R10.2 846.76,1219.66 856.97,1209.44 Q5.1
NetQ6_1: Q6.1 R11.2 | length 86.5
  Bottom w15: R11.2 1327.82,1219.66 1338.04,1209.44 Q6.1
PGND: C5.2 C6.2 C7.2 C8.2 C9.2 C10.2 C11.2 C12.2 C13.2 C14.2 C15.2 C16.2 C17.2 C18.2 C19.2 C20.2 C21.2 C22.2 C23.2 C24.2 C25.2 C26.2 C27.2 C28.2 C29.2 C30.2 C31.2 C32.2 C33.2 C34.2 C35.2 C36.2 C37.2 C38.2 D1.1 J7.1 Q4.2 Q4.3 Q4.4 Q4.5 Q4.6 Q4.7 Q4.8 Q5.2 Q5.3 Q5.4 Q5.5 Q5.6 Q5.7 Q5.8 Q6.2 Q6.3 Q6.4 Q6.5 Q6.6 Q6.7 Q6.8 R12.1
  other v1: 1717.91,1383.39 1799.37,1383.39 1214.37,1385 1279.37,1385 1149.37,1395 1717.91,1428.39 1799.37,1428.39 1214.37,1430 1279.37,1430 1149.37,1440 1717.91,1473.39 1214.37,1475 1279.37,1475 1799.37,1475 1149.37,1485 1717.91,1518.39 1799.37,1518.39 1279.37,1520 1219.05,1545 299.37,1550 344.37,1550 389.37,1550 434.37,1550 479.37,1550 524.37,1550 569.37,1550 614.37,1550 659.37,1550 704.37,1550 1717.91,1563.39 1799.37,1563.39 1279.37,1565 1279.37,1610 1719.37,1610 1799.37,1610 539.37,1655 1279.37,1655 1719.37,1655 1799.37,1655 539.37,1700 1279.37,1700 1719.37,1700 1799.37,1700 229.37,1710 304.37,1710 374.37,1710 439.37,1710 539.37,1745 1719.37,1745 1799.37,1745 229.37,1770 304.37,1770 374.37,1770 439.37,1770 539.37,1790 229.37,1830 304.37,1830 374.37,1830 439.37,1830 539.37,1830 1329.37,1845 1399.37,1845 1469.37,1845 1539.37,1845 1609.37,1845 1329.37,1900 1399.37,1900 1469.37,1900 1539.37,1900 1609.37,1900
SH_A: J4.5 NT1.1 Q1.2 Q1.3 Q1.4 Q1.5 Q1.6 Q1.7 Q1.8 Q4.9 R6.2 | length 534.4
  Top w10: v3(618.11,515) R6.2
  Top w15: J4.5 v4(189.37,502.6)
  Signal w15: v4(189.37,502.6) 211.97,502.6 v2(439.37,730)
  Bottom w10: NT1.1 v3(618.11,515) v3@619.37,515
  other v2: 464.37,695 524.37,695 584.37,695 644.37,695 709.37,695 494.37,730 554.37,730 614.37,730 674.37,730
SH_B: J4.6 NT3.1 Q2.2 Q2.3 Q2.4 Q2.5 Q2.6 Q2.7 Q2.8 Q5.9 R7.2 | length 1046.9
  Top w10: v3(1022.21,515) R7.2
  Top w15: J4.6 v4(164.37,471.1)
  Signal w15: v4(164.37,471.1) 240.47,471.1 394.37,625 835.13,625 v2(940.13,730)
  Bottom w10: NT3.1 v3(1022.21,515)
  other v2: 969.37,695 1029.37,695 1094.37,695 1159.37,695 999.37,730 1062.18,730 1129.1,730 1189.37,730
SH_C: J4.7 NT5.1 Q3.2 Q3.3 Q3.4 Q3.5 Q3.6 Q3.7 Q3.8 Q6.9 R8.2 | length 1346.7
  Top w10: v3(1424.13,515) R8.2
  Top w15: J4.7 272.6,470.55 333.82,470.55 v4(334.37,470)
  Signal w15: v4(334.37,470) 454.37,590 1264.37,590 v2(1404.37,730)
  Bottom w10: NT5.1 v3(1424.13,515)
  other v2: 1429.37,695 1489.37,695 1559.37,695 1629.37,695 1464.37,730 1529.37,730 1599.37,730 1659.37,730
SO_A: J5.5 U1.8 | length 1210.7
  Top w10: J5.5 v3(1834.37,502.6)
  Bottom w10: U1.8 866.58,407.79 939.37,335 1649.37,335 1816.97,502.6 v3(1834.37,502.6)
SO_B: J5.4 U2.8 | length 800.5
  Top w10: J5.4@1776.24,534.55 J5.4 1777.15,534.55 1833.92,534.55 v3(1834.37,535)
  Bottom w10: U2.8 1296.18,407.79 1343.97,360 1638.15,360 1811.24,533.09 1832.46,533.09 v3(1834.37,535)
SO_C: J5.3 U3.8 | length 371
  Top w10: J5.3@1776.4,565.3 J5.3 1776.99,565.3 1834.07,565.3 v3(1834.37,565)
  Bottom w10: U3.8@1586.93,407.75 U3.8 1647.16,407.79 1804.37,565 v3(1834.37,565)
TEMP_S: C1.1 J5.2 R3.1 R5.2 | length 396.4
  Top w10: J5.2 1809.17,597.09 1834.94,622.85 1834.94,744.43 v3(1834.37,745) v3@1834.37,742.29
  Bottom w10: R3.1@1759.69,869.68 C1.1@1835.89,869.68 ; v3@1834.54,745.17 R5.2@1834.54,784.83 ; R5.2@1835.46,785.74 C1.1@1835.46,869.26
  Bottom w15: R3.1 R3.1@1759.69,869.68 ; v3(1834.37,745) v3@1834.54,745.17 ; R5.2@1834.54,784.83 R5.2 R5.2@1835.46,785.74 ; C1.1@1835.46,869.26 1835.89,869.68 C1.1
U: J1.1 NT2.1 R6.1 | length 98.2
  Top w10: R6.1 v3(618.11,380)
  Bottom w10: v3(618.11,380) NT2.1
V: J2.1 NT4.1 R7.1 | length 98.2
  Top w10: R7.1 v3(1022.21,380)
  Bottom w10: v3(1022.21,380) NT4.1
W: J3.1 NT6.1 R8.1 | length 98.2
  Top w10: R8.1 v3(1424.13,381)
  Bottom w10: v3(1424.13,381) NT6.1
copper on no net:
  other v5: 140.16,435.67 1810.16,435.67 140.16,664.02 1810.16,664.02

## Polygon pours and split planes (outlines as drawn)
GND on Top "GND_L01_P087" (solid, remove dead copper, pour order 87): 1929.37,805 2047.24,805 2047.24,585 1894.37,585 1879.37,600 1879.37,655 1894.37,670 1919.37,670 1929.37,680
AGND on Top "Top-AGND" (solid, remove dead copper, pour order 91): 2047.24,404.17 2047.24,575 1859.37,575 1859.37,500 1844.37,485 1729.37,485 1709.37,465 1709.37,405 1710.2,404.17
PGND on Top "Top -PGND" (solid, remove dead copper, pour order 23): 1424.37,1815 1579.37,1815 1614.37,1780 1614.37,1370 1639.37,1345 2047.24,1345 2047.24,1970 1029.37,1970 1029.37,1392.71 1077.09,1345 1354.37,1345 1389.37,1380 1389.37,1780
U on Top "U_L01_P041" (solid, remove dead copper, pour order 41): 809.37,365 809.37,0 499.37,0 424.37,75 424.37,365
V on Top "V_L01_P042" (solid, remove dead copper, pour order 42): 1214.37,365 1214.37,-1.13 834.37,-1.13 834.37,365
W on Top "W_L01_P043" (solid, remove dead copper, pour order 43): 1239.37,365 1614.37,365 1614.37,80 1534.37,0 1239.37,0
DCBUS on Top "Top-DCBUS" (solid, remove dead copper, pour order 86): 0,670 50,620 174.37,620 214.37,580 329.37,580 344.37,595 344.37,665 324.37,685 230,685 174.37,740.63 174.37,820 219.37,865 2047.24,865 2047.24,1330 1639.37,1330 1604.37,1365 1604.37,1770 1569.37,1805 1434.37,1805 1399.37,1770 1399.37,1370 1364.37,1335 1064.37,1335 1014.37,1385 1014.37,1965 669.37,1965 669.37,1610 699.37,1580 729.37,1580 754.37,1555 754.37,1460 719.37,1425 0,1425 0,770
SH_A on Top "Top -SH_A" (solid, remove dead copper, pour order 32): 404.37,555 424.28,535.09 744.46,535.09 774.37,565 774.37,710 744.37,740 744.37,850 404.37,850
SH_C on Top "Top -SH_C" (solid, remove dead copper, pour order 36): 1694.37,850 1364.37,850 1364.37,730 1354.37,720 1319.37,720 1294.37,695 1294.37,555 1314.27,535.1 1669.47,535.1 1694.37,560
SH_B on Top "Top -SH_B" (solid, remove dead copper, pour order 40): 824.37,560 849.27,535.1 1204.47,535.1 1229.27,535.1 1229.37,535 1249.37,555 1249.37,719.13 1224.37,744.13 1224.37,850 884.37,850 884.37,740 824.37,680
PGND on Top "PGND_L01_P019" (solid, remove dead copper, pour order 19): 0,1440 0,1970 659.37,1970 659.37,1605 694.37,1570 729.37,1570 744.37,1555 744.37,1475 709.37,1440
DCBUS on Bottom "DCBUS_L04_P018" (solid, remove dead copper, pour order 18): 669.37,1970 669.37,1615 699.37,1585 774.37,1585 814.37,1545 814.37,1370 854.37,1330 989.37,1330 1019.37,1360 1019.37,1970
PGND on Bottom "Bottom-PGND" (solid, remove dead copper, pour order 82): 766.87,1262.5 769.37,1260 894.37,1260 884.37,1250 884.37,1120 911.87,1095 1209.37,1095 1239.37,1125 1239.37,1240 1249.37,1250 1319.37,1250 1384.37,1315 1384.37,1785 1424.37,1825 1584.37,1825 1619.37,1790 1619.37,1345 1589.37,1315 1429.37,1315 1364.37,1250 1364.37,1125 1394.37,1095 1904.37,1095 1929.37,1070 1929.37,815 2047.24,815 2047.24,1970 1029.37,1970 1029.37,1315 804.37,1315 804.37,1535 769.37,1570 694.37,1570 659.37,1605 659.37,1940 634.37,1965 0,1965 0,1260 394.37,1260 404.37,1250 404.37,1117 422.7,1095 729.37,1095 749.37,1115 749.37,1245
DCBUS on Bottom "DCBUS_L04_P025" (solid, remove dead copper, pour order 25): 1419.37,1335 1399.37,1355 1399.37,1770 1434.37,1805 1569.37,1805 1604.37,1770 1604.37,1355 1584.37,1335
PGND on Bottom "PGND_L04_P083" (solid, remove dead copper, pour order 83): 1314.37,1260 1394.37,1260 1399.37,1255 1459.37,1315 1359.37,1315
AGND on Bottom "AGND_L04_P064" (solid, remove dead copper, pour order 64): 1864.37,897.95 1864.37,755 1919.37,755 1919.37,897.95
GND on Bottom "GND_L04_P058" (solid, remove dead copper, pour order 58): 2047.24,805 2047.24,670 1929.37,670 1929.37,805
SH_C on Bottom "SH_C_L04_P047" (solid, remove dead copper, pour order 47): 1309.37,760 1309.37,665 1699.37,665 1699.37,760
SH_B on Bottom "SH_B_L04_P046" (solid, remove dead copper, pour order 46): 826.87,760 826.87,665 1216.87,665 1216.87,760
SH_A on Bottom "SH_A_L04_P045" (solid, remove dead copper, pour order 45): 349.37,760 349.37,665 739.37,665 739.37,760
PGND on Gnd "PGND_L02_P024" (solid, remove dead copper, pour order 24): -15.47,1095 2049.37,1095 2049.37,2005 -10.63,2005
AGND on Gnd "AGND_L02_P088" (solid, remove dead copper, pour order 88): 2009.37,585 1939.37,585 1924.37,600 1924.37,854.26 1864.37,854.26 1864.37,600 1849.37,585 469.37,585 449.37,565 449.37,415 464.37,400 2009.37,400
U on Gnd "U_L02_P068" (solid, remove dead copper, pour order 68): 424.37,253.15 809.37,253.15 809.37,0 499.37,0 424.37,75
V on Gnd "V_L02_P069" (solid, remove dead copper, pour order 69): 834.37,253.15 834.37,-1.13 1214.37,-1.13 1214.37,253.15
W on Gnd "W_L02_P070" (solid, remove dead copper, pour order 70): 1239.37,0 1239.37,253.15 1614.37,253.15 1614.37,80 1534.37,0
SH_C on Gnd "SH_C_L02_P076" (solid, remove dead copper, pour order 76): 1336.54,665 1309.37,692.16 1309.37,927.83 1336.54,955 1721.54,955 1746.54,930 1746.54,690 1721.54,665
SH_B on Gnd "SH_B_L02_P075" (solid, remove dead copper, pour order 75): 856.54,665 829.37,692.16 829.37,927.83 856.54,955 1241.54,955 1266.54,930 1266.54,690 1241.54,665
SH_A on Gnd "SH_A_L02_P074" (solid, remove dead copper, pour order 74): 374.37,665 347.21,692.16 347.21,927.83 374.37,955 759.37,955 784.37,930 784.37,690 759.37,665
U on Signal "U_L03_P071" (solid, remove dead copper, pour order 71): 424.37,253.15 809.37,253.15 809.37,0 499.37,0 424.37,75
V on Signal "V_L03_P072" (solid, remove dead copper, pour order 72): 834.37,253.15 834.37,-1.13 1214.37,-1.13 1214.37,253.15
W on Signal "W_L03_P073" (solid, remove dead copper, pour order 73): 1239.37,253.15 1239.37,0 1534.37,0 1614.37,80 1614.37,253.15
DCBUS on Signal "DCBUS_L03_P077" (solid, remove dead copper, pour order 77): -9.33,865 2047.24,865 2047.24,2005 0.67,2005

## Silkscreen, mask and mechanical layers (free items; w line width, h text height)
Top Overlay:
  lines w7: 399.37,355 439.37,355 469.37,385 ; 429.37,1318.18 429.37,1259.13 1629.37,1259.13 1629.37,1318.18 ; 429.37,1320 1629.37,1320 ; 439.37,385 469.37,385 ; 469.37,355 469.37,385 ; 759.37,885 759.37,1221.5 809.59,1221.5 809.59,885.22 809.37,885 759.37,885 ; 1237.68,885 1287.68,885 1287.91,885.22 1287.91,1221.5 1237.68,1221.5 1237.68,885
  text "_" at 1301.06,1941.51 h150
  text "+" at 705.78,1881.12 h150
  text "1mΩ" at 272.48,340 h60
  text "U" at 464.47,86.2 h100
  text "V" at 830.17,85 h100
  text "W" at 1163.01,85 h100
Bottom Overlay:
  drawing of 8 lines, arcs and shapes, not listed
  text "XJRC" at 535.67,1387.17 h180
  text "BLAZER FOC" at 143.2,1036.21 h150 r90
  text "2.2uF" at 1915.5,913.41 h45
  text "Driver" at 268.78,786.98 h120 r90
  text "3.3k" at 1897.58,715.54 h45
  text "0Ω" at 1984.85,715.54 h45
  text "NTC" at 1798.18,715.5 h45
  text "0.1uF" at 720.14,600.54 h45
  text "0.1uF" at 1120.14,600.54 h45
  text "0.1uF" at 1520.14,600.54 h45
  text "V1.0" at 264.04,331.85 h80 r90
Top Solder:
  region: 1469.37,1330 1469.37,1800 1524.37,1800 1524.37,1330
  region: 1369.04,742.5 1369.04,667.5 1689.03,667.5 1689.03,742.5
  region: 889.37,742.5 889.37,667.5 1209.37,667.5 1209.37,742.5
  region: 409.37,745 409.37,670 729.37,670 729.37,745
  region: 1242.8,1215 1282.8,1215 1282.8,890 1242.8,890
  region: 764.37,1215 804.37,1215 804.37,890 764.37,890
  region: 429.37,1315 429.37,1265 1629.37,1265 1629.37,1315
Bottom Solder:
  region: 434.37,1315 434.37,1260 1624.37,1260 1624.37,1315
Mechanical 1:
  the board outline again, w10